# Altium PCB PCB_PowerSupply7805.PcbDoc
Units mil, origin at the board's own origin, x right, y up, seen from the top; angles counter-clockwise.
Board outline 3075.03 x 930.02 mil, 2 copper layers (Top Layer, Bottom Layer); 10 components, 5 nets, 22 pads, 0 vias.
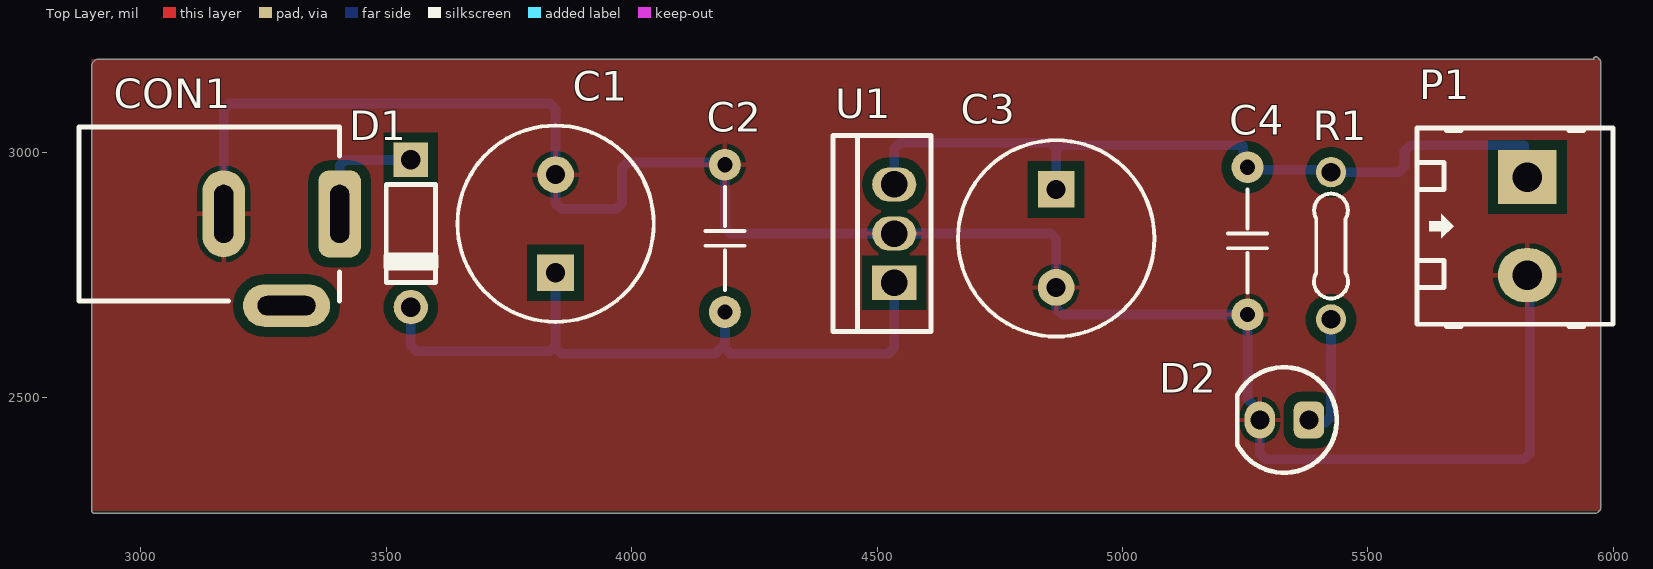
[diagram p0: Top Layer view]
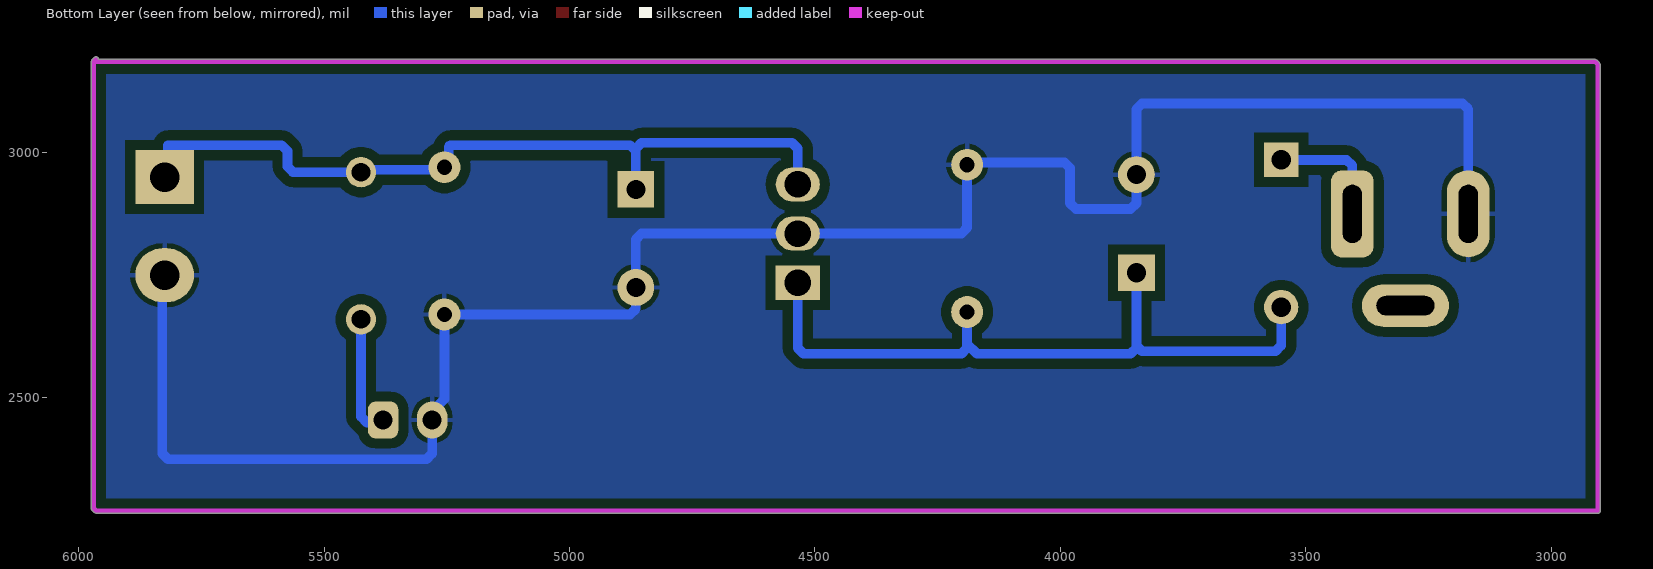
[diagram p1: Bottom Layer view, seen from below]
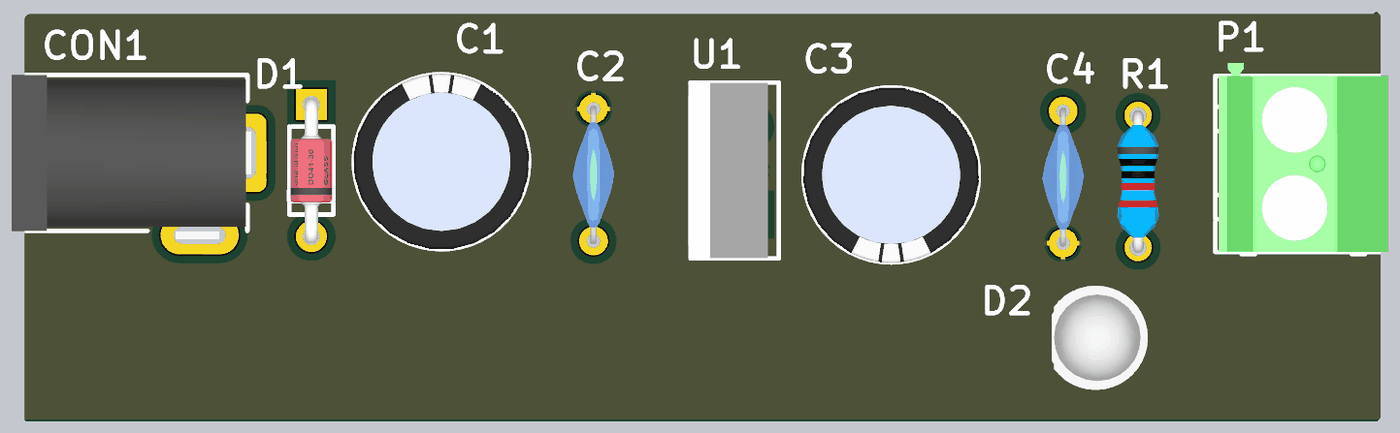
[diagram p2: 3D render of the assembled board from above, using the file's embedded part models]

## Layer stack, top to bottom
Top Solder: solder mask 0.4, Solder Resist, Dk 3.5
Top Layer: signal copper 1.4
Dielectric 1: dielectric 12.6, FR-4, Dk 4.8
Bottom Layer: signal copper 1.4
Bottom Solder: solder mask 0.4, Solder Resist, Dk 3.5

## Board outline
2899.99,2270 ccw(c2905,2270) 2905,2264.99 5965,2264.99 5968.55,2266.45 5973.55,2271.45 5975.02,2275 5975.02,3185 5973.55,3188.55 5968.55,3193.55 ccw(c5965,3190) 5959.98,3190.01 2910,3190.01 2906.45,3188.55 2901.45,3183.55 2899.99,3180

## Design rules (kind name [scope] priority, off if disabled: settings)
Clearance [All] p1: gap=20 ignorepadtopadclearanceinfootprint=FALSE
PolygonConnect [All] p1: connectstyle=Relief reliefconductorwidth=10 reliefentries=4 polygonreliefangle="90 Angle" airgapwidth=10
RoutingVias [All] p1: holewidth=28 width=50 viastyle="Through Hole" minholewidth=28 minwidth=50 maxholewidth=28 maxwidth=50
SolderMaskExpansion [All] p1: expansion=4 istentingtop=FALSE
Width [All] p1: maxlimit=100 minlimit=20 preferedwidth=40
30 further rules are at their usual default settings.

## Components (designator, comment, footprint, x,y, rotation, side; value= is the part's Value field where it differs from the comment)
C1 "1000uF" CYL/D.400/LS.200 3845,2855 r90 top
C2 "104" "CAP Ceramic/W300" 4190,2675 r90 top
C3 "1000uF" CYL/D.400/LS.200 4865,2825 r270 top
C4 "104" "CAP Ceramic/W300" 5255,2970 r270 top
CON1 "CON DC PWR" CONN/DC/PWR/5.0MM 3405,2875 r0 top
D1 "1N4007" DO-41 3550,2985 r270 top
D2 "Led" "LED 5MM - RED" 5330,2455 r180 top
P1 "Header 2" HDR/Terminal/2 5825,2850 r270 top
R1 "1K" "R 1/4W/300" 5425,2960 r270 top
U1 "78xx" TO-220 4535,2735 r90 top

## Footprints (in the part's own frame and the unit in brackets; to place one, negate y for a bottom-side part, rotate by r counter-clockwise, add the part's x,y. Pads: shape width x height; smd on the part's side, far side on the other; paste and mask are expansions set on the pad)
"CAP Ceramic/W300" [mil]
  round 65 hole 31: 1(0,0) 2(300,0)
  silkscreen extent 45,-40 255,40, body extent -8,-47 307,47, height 340
CONN/DC/PWR/5.0MM [mm]
  rrect50% 2.2x4.5 hole 1 slot 3 at 90 deg: 1(0,0)
  oval 2.2x4.5 hole 1 slot 3 at 90 deg: 2(-6,0)
  oval 4.5x2.2 hole 1 slot 3 at 0 deg: 3(-2.75,-4.75)
  silkscreen extent -13.5,-4.5 0,4.5, body extent -13.58,-5 0.25,4.5, height 11.02
CYL/D.400/LS.200 [mil]
  rect 75x75 hole 39: 1(-100,0)
  round 75 hole 39: 2(100,0)
  silkscreen extent -200,-200 200,200, body extent -198,-199 200,199, height 500
DO-41 [mil]
  rect 70x70 hole 39.37: 1(0,0)
  round 70 hole 39.37: 2(300,0)
  silkscreen extent 50,-55 250,55, body extent -15,-47 315,47, height 99
HDR/Terminal/2 [mil] "Header 2, 2 pin, hight 400mil, Pin to Pin 200mil, Colour Green"
  rect 110x120 hole 60: 1(-100,0)
  oval 110x120 hole 60: 2(100,0)
  silkscreen extent -200,-225 205,175, body extent -229,-218 200,168, height 559
"LED 5MM - RED" [mil]
  rrect50% 62x75 hole 39: 1(-50,0)
  oval 62x75 hole 39: 2(50,0)
  silkscreen extent -107,-108 96,108, body extent -117,-118 96,119, height 340
"R 1/4W/300" [mil] "Through hole resitor, axial 300mils, 1/4W"
  round 62 hole 38: 1(0,0) 2(300,0)
  silkscreen extent 44,-35 257,35, body extent -12,-47 312,47, height 97
TO-220 [mil]
  rect 70x90 hole 54: 1(0,0)
  oval 70x90 hole 54: 2(100,0) 3(200,0)
  silkscreen extent -100,-75 300,125, body extent -100,-50 300,130, height 730

## Part data
C1 C3: library part Capacitor, "Capacitor pol"
C2 C4: library part "Capacitor NP", "Capacitor non-pol"
CON1: "DC input connector"
D1: library part Diode, "Default Diode"
D2: "Typical LED"
P1: "Header, 2-Pin"
R1: library part Resistor, "Resistor"
U1: "LDO Fixed Voltage regulator"

## Nets (pads, with @x,y where several pads share a name; then routed paths per layer and width w, separated by ;. In a path a pad name is that pad's centre, name@x,y a point inside that pad or via, vN(x,y) a via of type N, cw(c..) or ccw(c..) an arc to the next point about the centre after c; other vN are vias at no path point)
+5: C3.1 C4.1 P1.1 R1.1 U1.3 | length 1612.8
  Top Layer w20: C3.1 C3.1@4870,2930
  Bottom Layer w20: U1.3 4535,3008.28 4546.72,3020 4853.28,3020 4865,3008.28 4865,3003.28 ; C3.1 4865,3003.28 ; P1.1 5818.28,2956.72 5818.28,3015 5586.72,3015 5575,3003.28 5575,2971.72 5563.28,2960 R1.1 5420,2965 5260,2965 C4.1 5246.39,2978.61 5246.39,3011.89 5243.28,3015 4876.72,3015 4865,3003.28
GND: C1.2 C2.2 C3.2 C4.2 CON1.2 D2.2 P1.2 U1.2 | length 4108.7
  Top Layer w20: C1.2 C1.2@3850,2960 ; C3.2 C3.2@4870,2730 ; P1.2 P1.2@5826.72,2748.28
  Bottom Layer w20: CON1.2 3168.78,3088.28 3180.5,3100 3833.28,3100 3845,3088.28 C1.2 3845,2896.72 3856.72,2885 3968.28,2885 3980,2896.72 3980,2968.28 3991.72,2980 4185,2980 C2.2 4190,2846.72 4201.72,2835 U1.2 4853.28,2835 4865,2823.28 C3.2 4865,2681.72 4876.72,2670 C4.2 5255,2497.87 5280,2472.87 D2.2 5280,2386.72 5291.72,2375 5818.28,2375 5830,2386.72 5830,2745 P1.2
NetC1_1: C1.1 C2.1 D1.2 U1.1 | length 1455.7
  Bottom Layer w20: D1.2 3550,2606.72 3561.72,2595 3833.28,2595 3845,2606.72 ; C1.1 3845,2606.72 ; C2.1 4190,2610 ; U1.1 4535,2601.72 4523.28,2590 4201.72,2590 4190,2601.72 4190,2610 ; 3845,2606.72 3845,2601.72 3856.72,2590 4170,2590 4190,2610
NetCON1_1: CON1.1 D1.1 | length 276.4
  Top Layer w20: CON1.1 CON1.1@3420,2890 ; D1.1@3545,2990 D1.1
  Bottom Layer w20: CON1.1 3405,2973.28 3416.72,2985 D1.1
NetD2_1: D2.1 R1.2 | length 250.2
  Bottom Layer w20: D2.1 5385,2450 5413.28,2450 5425,2461.72 R1.2
pads on no net: CON1.3

## Polygon pours and split planes (outlines as drawn)
GND on Bottom Layer "GND_L02_P000" (solid, remove dead copper, pour order 0): 2905,3180 2915,3190 5965,3190 5965,2280 5970,2275 5965,2270 2905,2270
GND on Top Layer "GND_L01_P001" (solid, remove dead copper, pour order 1): 2900,3190 5970,3190 5975,3195 5975,2270 2900,2270

## Keep-outs
Bottom Layer:
  lines w10: 5965,3190 5970,3185 ; 5970,3185 2910,3185 2905,3180 2905,2270 5965,2270 5970,2275 5970,3185